# Altium PCB XR1075_Extension(Altium)v1.4.pcbdoc
Units mil, origin at the board's own origin, x right, y up, seen from the top; angles counter-clockwise.
Board outline 2643.86 x 2033.62 mil, 2 copper layers (Top Layer, Bottom Layer); 17 components, 20 nets, 54 pads, 37 vias.
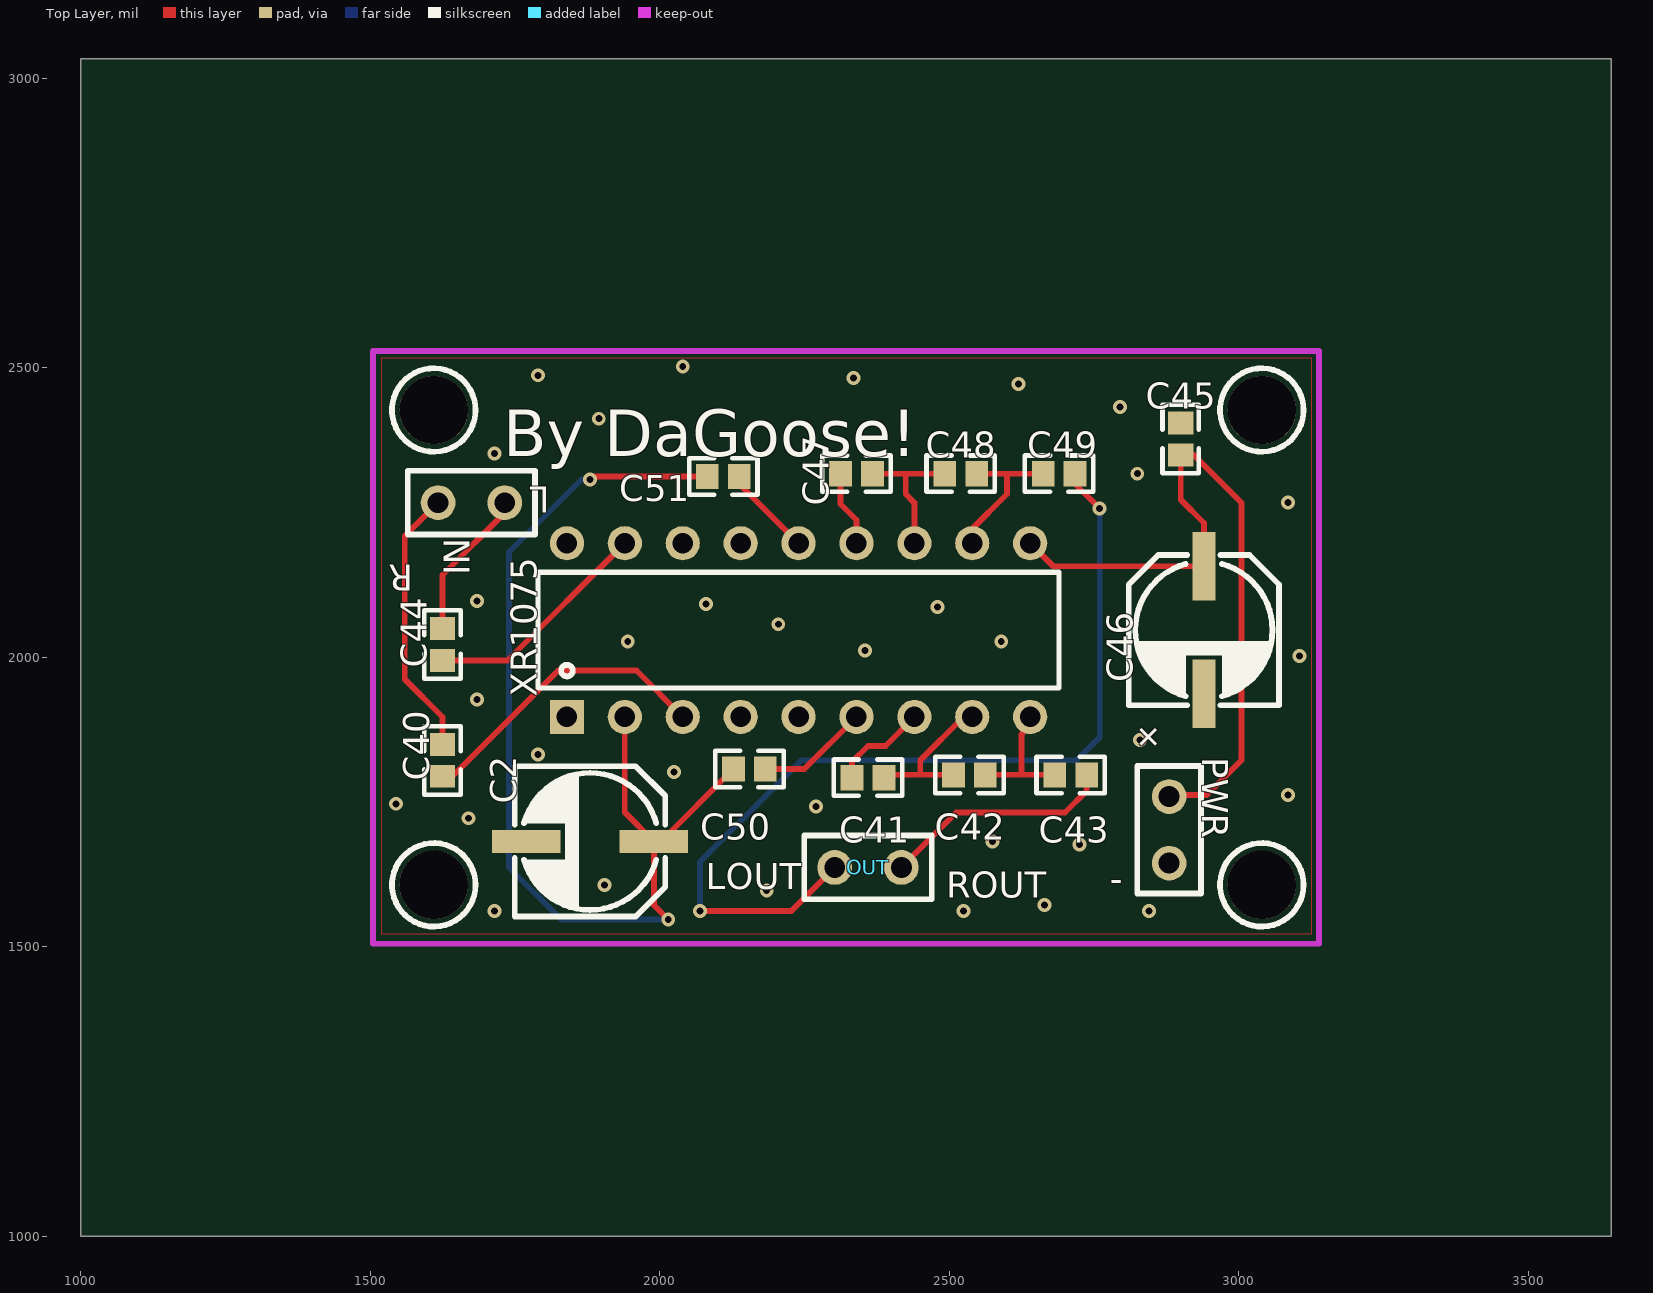
[diagram p0: Top Layer view]
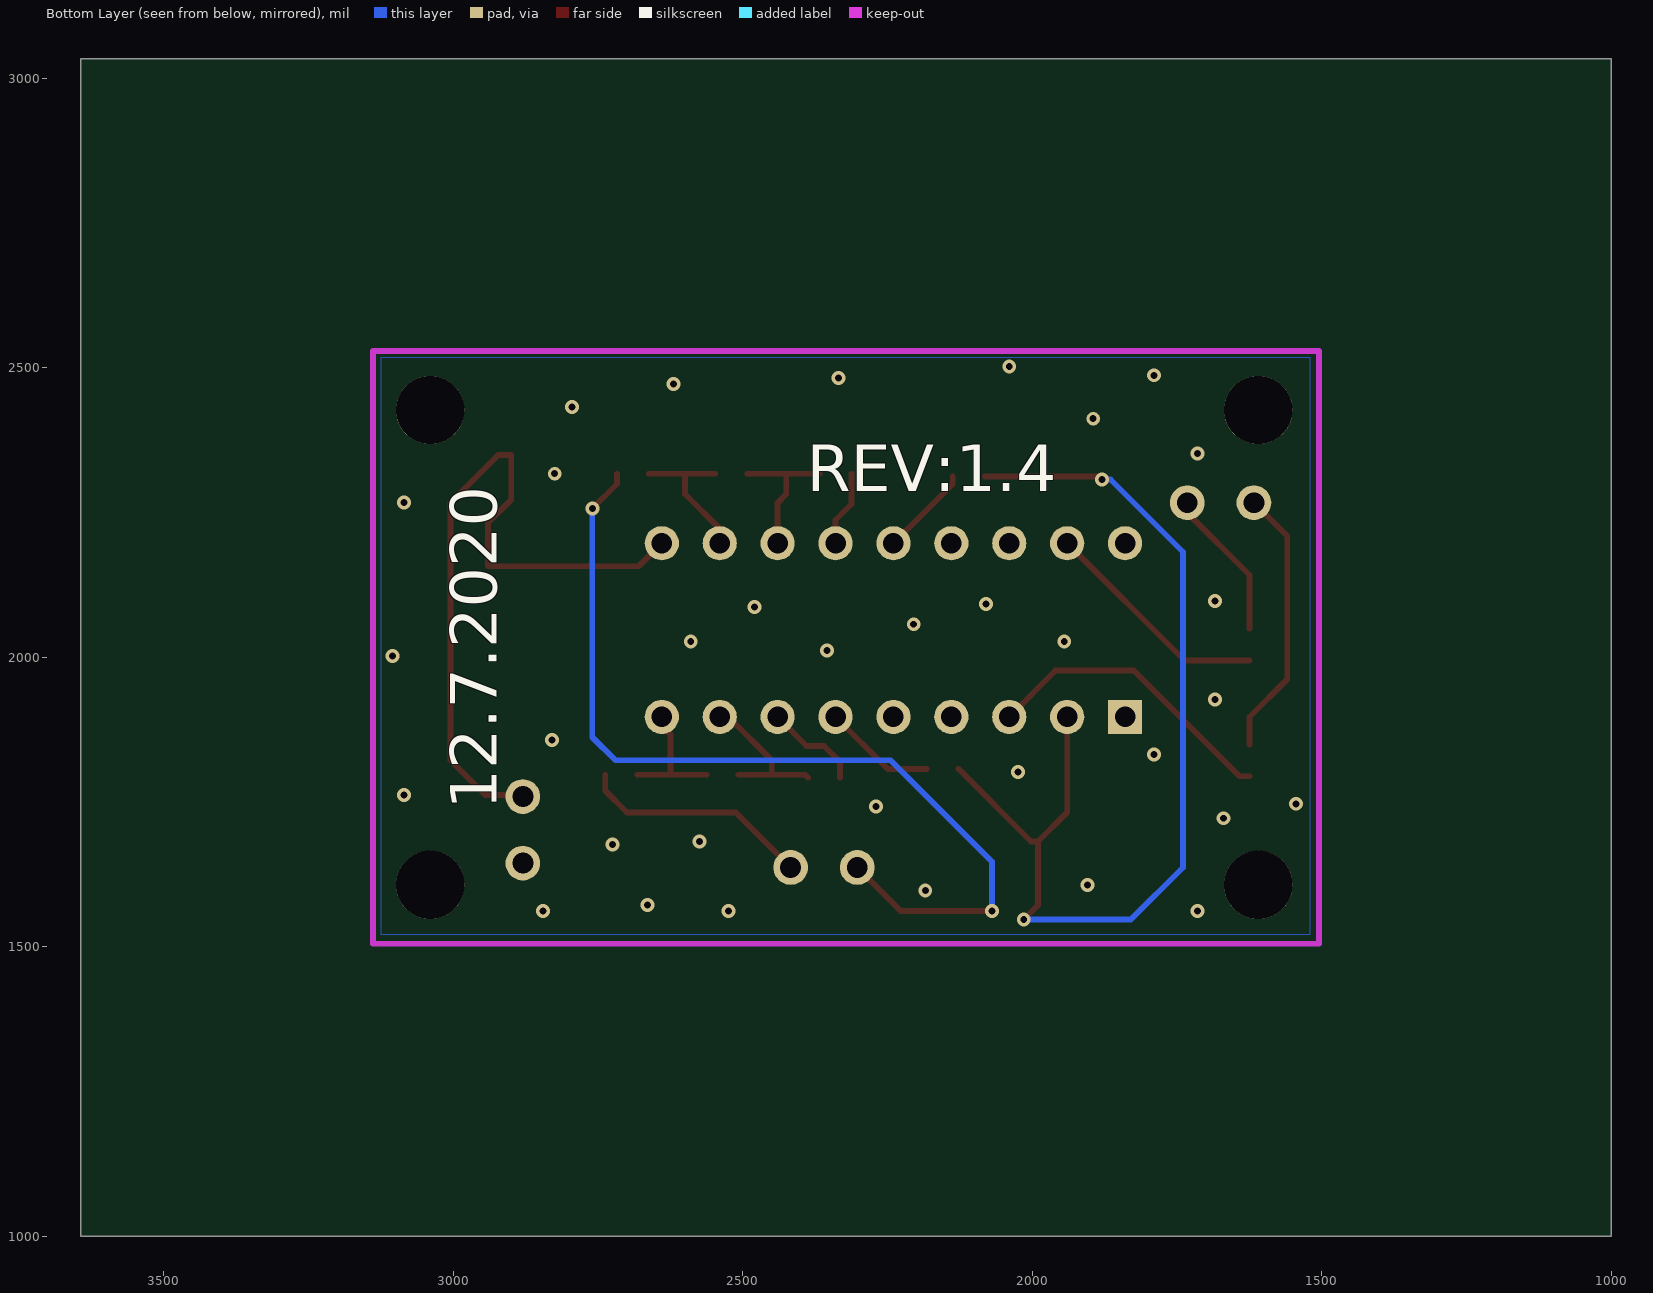
[diagram p1: Bottom Layer view, seen from below]

## Layer stack, top to bottom
Top Layer: signal copper (thickness not stored)
Dielectric: dielectric 12.6, FR-4, Dk 4.8
Bottom Layer: signal copper (thickness not stored)

## Board outline
3643.86,1000 1000,1000 1000,3033.62 3643.86,3033.62

## Components (designator, comment, footprint, x,y, rotation, side; value= is the part's Value field where it differs from the comment)
C2 "CAP-SMD_BD6.3-L6.6-W6.6-FD" CAP-SMD_BD6.3-L6.6-W6.6-FD 1880,1681.61 r180 top
C40 "0603" 0603 1625,1821.61 r90 top
C41 "0603" 0603 2360,1791.61 r0 top
C42 "0603" 0603 2535,1796.61 r0 top
C43 "0603" 0603 2710,1796.61 r0 top
C44 "0603" 0603 1625,2021.61 r90 top
C45 "0603" 0603 2900,2376.61 r270 top
C46 "CAP-SMD_BD6.3-L6.6-W6.6-FD" CAP-SMD_BD6.3-L6.6-W6.6-FD 2940,2046.61 r270 top
C47 "0603" 0603 2340,2316.61 r0 top
C48 "0603" 0603 2520,2316.61 r0 top
C49 "0603" 0603 2690,2316.61 r0 top
C50 "0603" 0603 2155,1806.61 r0 top
C51 "0603" 0603 2110,2311.61 r0 top
IN "CONNECTOR (2)" "CONNECTOR (2)" 1675,2266.61 r180 top
OUT "CONNECTOR (2)" "CONNECTOR (2)" 2360,1636.61 r180 top
PWR "CONNECTOR (2)" "CONNECTOR (2)" 2880,1701.61 r90 top
XR1075 "DIP18" DIP18 1840,1896.61 r0 top

## Footprints (in the part's own frame and the unit in brackets; to place one, negate y for a bottom-side part, rotate by r counter-clockwise, add the part's x,y. Pads: shape width x height; smd on the part's side, far side on the other; paste and mask are expansions set on the pad)
0603 [mm]
  rect 1x1.1 smd: 1(-0.7,0) 2(0.7,0)
  silkscreen extent -1.5,-0.8 1.5,0.8
CAP-SMD_BD6.3-L6.6-W6.6-FD [mm]
  rect 3x1 smd: 1(-2.8,0) 2(2.8,0)
  silkscreen extent -3.3,-3.3 3.3,3.3
"CONNECTOR (2)" [mil]
  round 60 hole 36: 1(-57.5,0) 2(57.5,0)
  silkscreen extent -110,-55 110,55
DIP18 [mm]
  rect 1.5x1.5 hole 0.9: 1(0,0)
  round 1.5 hole 0.9: 2(2.54,0) 3(5.08,0) 4(7.62,0) 5(10.16,0) 6(12.7,0) 7(15.24,0) 8(17.78,0) 9(20.32,0) 10(20.32,7.62) 11(17.78,7.62) 12(15.24,7.62) 13(12.7,7.62) 14(10.16,7.62) 15(7.62,7.62) 16(5.08,7.62) 17(2.54,7.62) 18(0,7.62)
  silkscreen extent -1.27,1.27 21.59,6.35

## Free pads (board coordinates)
  round 118.11 hole 118.11 unplated: ""(1610,1606.61) ""(1610,2426.61) ""(3040,1606.61) ""(3040,2426.61)

## Via types
v1: diameter 24, hole 12, Top Layer to Bottom Layer, 37 vias

## Nets (pads, with @x,y where several pads share a name; then routed paths per layer and width w, separated by ;. In a path a pad name is that pad's centre, name@x,y a point inside that pad or via, vN(x,y) a via of type N, cw(c..) or ccw(c..) an arc to the next point about the centre after c; other vN are vias at no path point)
GND: C2.2 C45.1 C46.2 PWR.1 XR1075.1 XR1075.18
  other v1: 1715,1561.61 2525,1561.61 2845,1561.61 2665,1571.61 2185,1596.61 1905,1606.61 2725,1676.61 2575,1681.61 1670,1721.61 2270,1741.61 1545,1746.61 3085,1761.61 2025,1801.61 1790,1831.61 2830,1856.61 1685,1926.61 3105,2001.61 2355,2011.61 1945,2026.61 2590,2026.61 2205,2056.61 2480,2086.61 2080,2091.61 1685,2096.61 3085,2266.61 2825,2316.61 1715,2351.61 1895,2411.61 2795,2431.61 2620,2471.61 2335,2481.61 1790,2486.61 2040,2501.61
S$67: 
S$69: 
S$498: C2.1 C50.1 C51.1 XR1075.2 | length 1823.6
  Top Layer w10: v1(1880,2306.61) 1885,2311.61 C51.1 ; XR1075.2 1940,1731.85 C2.1 1990.24,1571.37 v1(2015,1546.61) ; C2.1 2002.4,1681.61 C50.1
  Bottom Layer w10: v1(1880,2306.61) 1865,2306.61 1740,2181.61 1740,1636.61 1830,1546.61 v1(2015,1546.61)
S$554: C45.2 C46.1 PWR.2 XR1075.10 | length 1260.3
  Top Layer w10: XR1075.10 2679.76,2156.85 2940,2156.85 2940,2231.61 2900,2271.61 C45.2 2922.56,2349.05 3005,2266.61 3005,1821.61 2945,1761.61 2882.5,1761.61 PWR.2
S$583: C44.2 IN.1 | length 262
  Top Layer w10: C44.2 1625,2141.61 1732.5,2249.11 IN.1
S$585: C40.2 IN.2 | length 468.2
  Top Layer w10: IN.2 1560,2209.11 1560,1961.61 1625,1896.61 C40.2@1625,1849.11
S$610: C47.1 XR1075.13 | length 131.4
  Top Layer w10: C47.1 2312.44,2264.18 2340,2236.61 XR1075.13
S$612: C47.2 C48.1 XR1075.12 | length 251.1
  Top Layer w10: C47.2 C48.1 ; 2425,2316.61 2425,2281.61 2440,2266.61 XR1075.12
S$614: C48.2 C49.1 XR1075.11 | length 259.7
  Top Layer w10: XR1075.11 2540,2221.61 2600,2281.61 2600,2316.61 ; C48.2 C49.1
S$625: C49.2 OUT.2 | length 1600.2
  Top Layer w10: v1(2070,1561.61) 2227.5,1561.61 OUT.2 ; C49.2 2717.56,2299.05 v1(2760,2256.61)
  Bottom Layer w10: v1(2070,1561.61) 2070,1646.61 2245,1821.61 2720,1821.61 2760,1861.61 v1(2760,2256.61)
S$678: C40.1 XR1075.3 | length 523.8
  Top Layer w10: C40.1 1642.44,1794.05 1825,1976.61 1960,1976.61 XR1075.3
S$680: C44.1 XR1075.17 | length 398.9
  Top Layer w10: C44.1 1737.44,1994.05 XR1075.17
S$905: 
S$1150: C43.2 OUT.1 | length 402.4
  Top Layer w10: OUT.1 2512.5,1731.61 2700,1731.61 2737.56,1769.17 C43.2
S$1153: C50.2 XR1075.6 | length 194.7
  Top Layer w10: C50.2 2250,1806.61 XR1075.6
S$1155: C41.1 XR1075.7 | length 167.1
  Top Layer w10: C41.1 2332.4,1819.01 2360,1846.61 2390,1846.61 XR1075.7
S$1157: C41.2 C42.1 XR1075.8 | length 268
  Top Layer w10: C41.2 2392.56,1796.61 C42.1 ; 2450,1796.61 2450,1821.61 2525,1896.61 XR1075.8
S$1160: C42.2 C43.1 XR1075.9 | length 226.1
  Top Layer w10: C42.2 C43.1 ; 2625,1796.61 2625,1866.61 2640,1881.61 XR1075.9
S$1178: C51.2 XR1075.14 | length 157.4
  Top Layer w10: C51.2 2137.56,2299.05 XR1075.14
pads on no net: XR1075.4 XR1075.5 XR1075.15 XR1075.16

## Polygon pours and split planes (outlines as drawn)
GND on Top Layer (solid): 1520,2516.61 3125,2516.61 3125,1521.61 1520,1521.61
GND on Bottom Layer (solid): 1520,2516.61 3125,2516.61 3125,1521.61 1520,1521.61

## Silkscreen, mask and mechanical layers (free items; w line width, h text height)
Top Overlay:
  circle w10 net S$905: c1610,1606.61 r72.11
  circle w10 net S$905: c1610,2426.61 r72.11
  circle w10 net S$905: c3040,2426.61 r72.11
  circle w10 net S$905: c3040,1606.61 r72.11
  text "By DaGoose!" at 1730,2346.61 h80
  text "L" at 1810,2294.11 h45 r180
  text "R" at 1575,2159.11 h45 r180
  text "+" at 2875.91,1857.52 h45 r135
  text "-" at 2800,1629.11 h45 r180
  text "LOUT" at 2080,1599.11 h45
  text "ROUT" at 2495,1584.11 h45
Bottom Overlay:
  text "REV:1.4" at 2390,2286.61 h80
  text "12.7.2020" at 2925,1736.61 h80 r270
Document:
  lines w0.1: 2320.93,2015.81 2322.93,2017.81